# Altium PCB PCB1.PcbDoc
Units mil, origin at the board's own origin, x right, y up, seen from the top; angles counter-clockwise.
Board outline 6000 x 4000 mil, 2 copper layers (Top Layer, Bottom Layer); 93 components, 53 nets, 288 pads, 0 vias.
Unrouted connection lines stored in the file: 120.
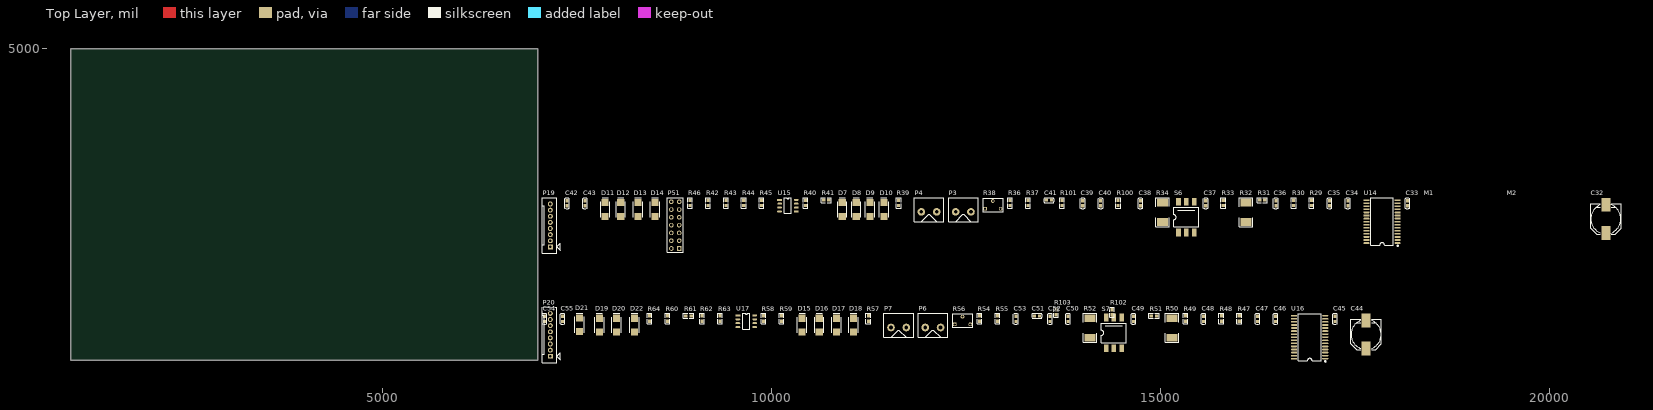
[diagram p0: Top Layer view]
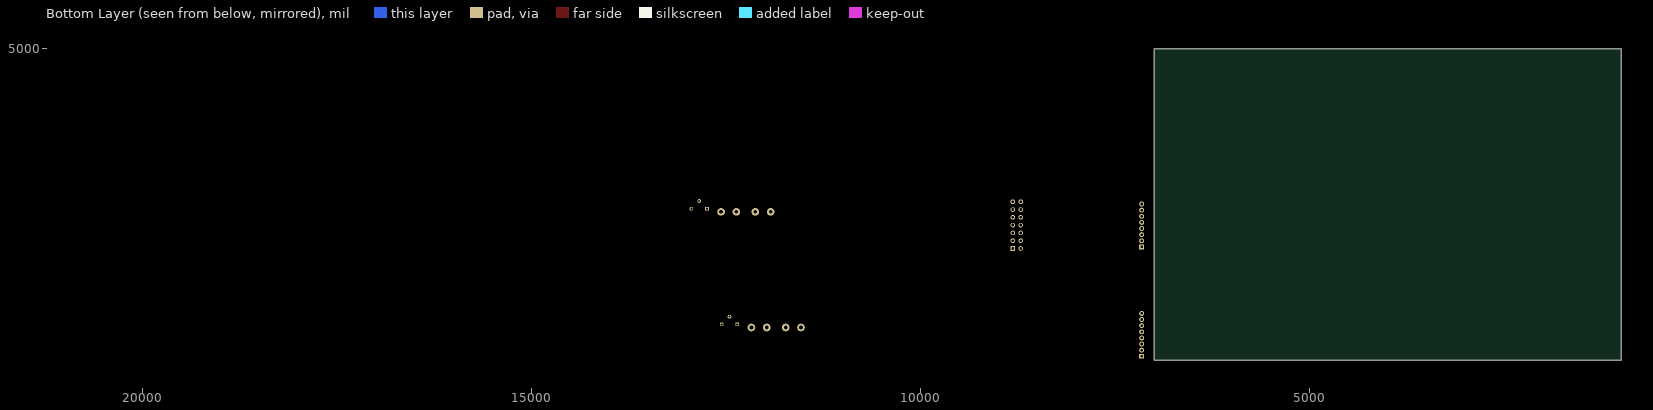
[diagram p1: Bottom Layer view, seen from below]

## Layer stack, top to bottom
Top Solder: solder mask 0.4, Solder Resist, Dk 3.5
Top Layer: signal copper 1.4
Dielectric 1: dielectric 12.6, FR-4, Dk 4.8
Bottom Layer: signal copper 1.4
Bottom Solder: solder mask 0.4, Solder Resist, Dk 3.5

## Board outline
1000,1000 7000,1000 7000,5000 1000,5000

## Design rules (kind name [scope] priority, off if disabled: settings)
Clearance [All] p1: gap=10
PolygonConnect [All] p1: connectstyle=Relief reliefconductorwidth=10 reliefentries=4 polygonreliefangle="90 Angle" airgapwidth=10
RoomDefinition 搅拌驱动驱动 [InComponentClass('搅拌驱动驱动')] p1: confinementstyle=ConfineIn formatcopy=TRUE lockcomponents=FALSE outline 7045,1740 20930,1740 20930,3195 7045,3195
RoomDefinition 升降电机驱动 [InComponentClass('升降电机驱动')] p2: confinementstyle=ConfineIn formatcopy=TRUE lockcomponents=FALSE outline 7045,960 18700,960 18700,1790 7045,1790
RoutingVias [All] p1: holewidth=28 width=50 viastyle="Through Hole" minholewidth=28 minwidth=50 maxholewidth=28 maxwidth=50
SolderMaskExpansion [All] p1: expansion=4
Width [All] p1: maxlimit=10 minlimit=10 preferedwidth=10
30 further rules are at their usual default settings.

## Classes and differential pairs
component class 搅拌驱动驱动: C32 C33 C34 C35 C36 C37 C38 C39 C40 C41 C42 C43 D7 D8 D9 D10 D11 D12 D13 D14 M1 M2 P3 P4 P19 P51 R29 R30 R31 R32 R33 R34 R36 R37 R38 R39 R40 R41 R42 R43 R44 R45 R46 R100 R101 S6 U14 U15
component class 升降电机驱动: P20 R102 R103

## Components (designator, comment, footprint, x,y, rotation, side; value= is the part's Value field where it differs from the comment)
C32 "Cap Pol" C-RB-S10 20720,2815 r90 top
C33 "Cap" C-RAD-0603 18170,3015 r90 top
C34 "Cap" C-RAD-0603 17405,3015 r90 top
C35 "Cap" C-RAD-0603 17170,3015 r90 top
C36 "Cap" C-RAD-0603 16480,3015 r90 top
C37 "Cap" C-RAD-0603 15580,3015 r90 top
C38 "Cap" C-RAD-0603 14740,3015 r90 top
C39 "Cap" C-RAD-0603 14000,3015 r90 top
C40 "Cap" C-RAD-0603 14230,3015 r90 top
C41 "Cap" C-RAD-0603 13565,3055 r0 top
C42 "Cap" C-RAD-0603 7375,3015 r90 top
C43 "Cap" C-RAD-0603 7605,3015 r90 top
C44 "Cap Pol" C-RB-S10 17640,1330 r90 top
C45 "Cap" C-RAD-0603 17240,1530 r90 top
C46 "Cap" C-RAD-0603 16475,1530 r90 top
C47 "Cap" C-RAD-0603 16245,1530 r90 top
C48 "Cap" C-RAD-0603 15550,1530 r90 top
C49 "Cap" C-RAD-0603 14650,1530 r90 top
C50 "Cap" C-RAD-0603 13810,1530 r90 top
C51 "Cap" C-RAD-0603 13410,1570 r0 top
C52 "Cap" C-RAD-0603 13580,1530 r90 top
C53 "Cap" C-RAD-0603 13140,1530 r90 top
C54 "Cap" C-RAD-0603 7085,1530 r90 top
C55 "Cap" C-RAD-0603 7315,1530 r90 top
D7 "D-Schottky" DIODE-SMA 10910,2935 r90 top
D8 "D-Schottky" DIODE-SMA 11090,2935 r90 top
D9 "D-Schottky" DIODE-SMA 11265,2935 r90 top
D10 "D-Schottky" DIODE-SMA 11445,2935 r90 top
D11 "D-Schottky" DIODE-SMA 7865,2935 r90 top
D12 "D-Schottky" DIODE-SMA 8065,2935 r90 top
D13 "D-Schottky" DIODE-SMA 8285,2935 r90 top
D14 "D-Schottky" DIODE-SMA 8505,2935 r90 top
D15 "D-Schottky" DIODE-SMA 10395,1450 r90 top
D16 "D-Schottky" DIODE-SMA 10615,1450 r90 top
D17 "D-Schottky" DIODE-SMA 10835,1450 r90 top
D18 "D-Schottky" DIODE-SMA 11055,1450 r90 top
D19 "D-Schottky" DIODE-SMA 7790,1450 r90 top
D20 "D-Schottky" DIODE-SMA 8010,1450 r90 top
D21 "D-Schottky" DIODE-SMA 7535,1455 r90 top
D22 "D-Schottky" DIODE-SMA 8240,1450 r90 top
M1 "散热器" 26*26*10对角37.5 18880,2420 r90 top
M2 "散热器" 26*26*10对角37.5 19950,2420 r90 top
P3 "cnt2p" 接线端子5mm间距2p 12465,2905 r0 top
P4 "cnt2p" 接线端子5mm间距2p 12025,2905 r0 top
P6 "cnt2p" 接线端子5mm间距2p 12075,1420 r0 top
P7 "cnt2p" 接线端子5mm间距2p 11635,1420 r0 top
P19 "Header 8" PH2.0-8P 7160,2455 r90 top
P20 "Header 8" PH2.0-8P 7160,1050 r90 top
P51 "Header 7X2" HDR7X2_A1 8815,2435 r90 top
R29 "Res1" 0603-1 16940,3020 r90 top
R30 "Res1" 0603-1 16710,3020 r90 top
R31 "Res1" 0603-1 16305,3055 r0 top
R32 "Res1" 2512 16095,2900 r90 top
R33 "Res1" 0603-1 15805,3020 r90 top
R34 "Res1" 2512 15025,2900 r90 top
R36 "Res1" 0603-1 13065,3020 r90 top
R37 "Res1" 0603-1 13295,3020 r90 top
R38 "RPot" VR-3266W 12845,2995 r0 top
R39 "Res1" 0603-1 11635,3020 r90 top
R40 "Res1" 0603-1 10440,3020 r90 top
R41 "Res1" 0603-1 10705,3055 r0 top
R42 "Res1" 0603-1 9185,3020 r90 top
R43 "Res1" 0603-1 9415,3020 r90 top
R44 "Res1" 0603-1 9645,3020 r90 top
R45 "Res1" 0603-1 9875,3020 r90 top
R46 "Res1" 0603-1 8955,3020 r90 top
R47 "Res1" 0603-1 16010,1535 r90 top
R48 "Res1" 0603-1 15780,1535 r90 top
R49 "Res1" 0603-1 15320,1535 r90 top
R50 "Res1" 2512 15145,1415 r90 top
R51 "Res1" 0603-1 14915,1570 r0 top
R52 "Res1" 2512 14095,1415 r90 top
R54 "Res1" 0603-1 12675,1535 r90 top
R55 "Res1" 0603-1 12905,1535 r90 top
R56 "RPot" VR-3266W 12455,1510 r0 top
R57 "Res1" 0603-1 11245,1535 r90 top
R58 "Res1" 0603-1 9900,1535 r90 top
R59 "Res1" 0603-1 10130,1535 r90 top
R60 "Res1" 0603-1 8665,1535 r90 top
R61 "Res1" 0603-1 8935,1570 r0 top
R62 "Res1" 0603-1 9110,1535 r90 top
R63 "Res1" 0603-1 9340,1535 r90 top
R64 "Res1" 0603-1 8435,1535 r90 top
R100 "Res1" 0603-1 14455,3020 r90 top
R101 "Res1" 0603-1 13735,3020 r90 top
R102 "Res1" 0603-1 14375,1615 r90 top
R103 "Res1" 0603-1 13655,1615 r90 top
S6 "SW3" SW6_3BIT 15230,2640 r0 top
S7 "SW3" SW6_3BIT 14300,1155 r0 top
U14 "THB6128/LV8728" SIOC-30-W 17845,2780 r90 top
U15 "EL0631" EL0631 10105,3060 r0 top
U16 "THB6128/LV8728" SIOC-30-W 16915,1295 r90 top
U17 "EL0631" EL0631 9570,1575 r0 top

## Footprints (in the part's own frame and the unit in brackets; to place one, negate y for a bottom-side part, rotate by r counter-clockwise, add the part's x,y. Pads: shape width x height; smd on the part's side, far side on the other; paste and mask are expansions set on the pad)
26*26*10对角37.5 [mil]
  round 60 hole 125.98: 0(-590,-432.5) 0(590,432.5)
  body extent -670,-512 669,511, height 591
0603-1 [mm] "贴片带丝印"
  rect 1.1x1 smd: 1(-0.85,0) 2(0.85,0)
  silkscreen extent -1.65,-0.76 1.65,0.76, body extent -0.8,-0.38 0.8,0.42, height 0.3
2512 [mm] "保险丝"
  rect 2.5x3.6 smd: 1(-3.175,0) 2(3.175,0)
  silkscreen extent -4.7,-2.2 4.7,2.2, body extent -3.05,-1.5 3.3,1.5, height 1.6
C-RAD-0603 [mm] "贴片电容"
  rect 1.1x1 smd: 1(-0.85,0) 2(0.85,0)
  silkscreen extent -1.73,-0.76 1.73,0.76, body extent -0.8,-0.38 0.8,0.42, height 0.3
C-RB-S10 [mm] "贴片电解"
  rect 4.5x3 smd: 1(-4.6,0) 2(4.6,0)
  silkscreen extent -5,-5 5,5, body extent -5.5,-5.2 5.5,5.2, height 10.41
DIODE-SMA [mm] "贴片二极管"
  rect 2.3x2.3 smd: 1(-2.25,0) 2(2.25,0)
  silkscreen extent -2.54,-1.52 3.81,1.52, body extent -2.3,-1.35 2.3,1.35, height 2.4
EL0631 [mm]
  rect 1.52x0.64 smd: 1(0,0)
  oval 1.52x0.64 smd: 2(0,-1.27) 3(0,-2.54) 4(0,-3.81) 5(5.47,-3.81) 6(5.47,-2.54) 7(5.47,-1.27) 8(5.47,0)
  silkscreen extent 1.59,-4.44 3.88,0.64
HDR7X2_A1 [mm] "Connector; Header; 7x2 Position"
  rect 1.5x1.5 hole 0.9: 1(0,0)
  round 1.5 hole 0.9: 2(0,2.54) 3(2.54,0) 4(2.54,2.54) 5(5.08,0) 6(5.08,2.54) 7(7.62,0) 8(7.62,2.54) 9(10.16,0) 10(10.16,2.54) 11(12.7,0) 12(12.7,2.54) 13(15.24,0) 14(15.24,2.54)
  silkscreen extent -1.27,-1.27 16.51,3.81
PH2.0-8P [mm]
  rect 1.6x1.6 hole 0.86: 1(0,0)
  round 1.6 hole 0.86: 2(2,0) 3(4,0) 4(6,0) 5(8,0) 6(10,0) 7(12,0) 8(14,0)
  silkscreen extent -2.03,-3.17 16,2.67
SIOC-30-W [mm]
  oval 0.55x2 smd: 1(-7,-5.08) 2(-6,-5.08) 3(-5,-5.08) 4(-4,-5.08) 5(-3,-5.08) 6(-2,-5.08) 7(-1,-5.08) 8(0,-5.08) 9(1,-5.08) 10(2,-5.08) 11(3,-5.08) 12(4,-5.08) 13(5,-5.08) 14(6,-5.08) 15(7,-5.08) 16(7,5.08) 17(6,5.08) 18(5,5.08) 19(4,5.08) 20(3,5.08) 21(2,5.08) 22(1,5.08) 23(0,5.08) 24(-1,5.08) 25(-2,5.08) 26(-3,5.08) 27(-4,5.08) 28(-5,5.08) 29(-6,5.08) 30(-7,5.08)
  silkscreen extent -8.1,-5.3 7.73,3.7, body extent -7.8,-5.25 7.75,5.25, height 2.37
SW6_3BIT [mm] "贴片拨码开关2.54"
  rect 1.5x2.5 smd: 1(0,0) 2(2.54,0) 3(5.08,0) 4(5.08,10) 5(2.54,10) 6(0,10)
  silkscreen extent -1.52,1.83 6.6,8.18, body extent -1.27,0.43 6.35,9.73, height 4.35
VR-3266W [mm] "3266电位器"
  rect 1.2x1.2 hole 0.7: 1(-2.54,-1.27)
  round 1.2 hole 0.7: 2(0,1.27) 3(2.54,-1.27)
  silkscreen extent -3.3,-2.29 3.41,2.21, body extent -3.3,-2.29 3.4,2.21, height 8.25
接线端子5mm间距2p [mm]
  round 2.5 hole 1.2: 1(-2.5,0) 2(2.5,0)
  silkscreen extent -4.81,-3.24 4.84,4.57, body extent -4.94,-3.11 4.96,4.49, height 10

## Part data
C32 C44: "极性电解电容"
C33 C34 C35 C36 C37 C38 C39 C40 C41 C42 C43 C45 C46 C47 C48 C49 C50 C51 C52 C53 C54 C55: "无极性电容"
D7 D8 D9 D10 D11 D12 D13 D14 D15 D16 D17 D18 D19 D20 D21 D22: "肖特基二极管"
M1 M2: library part 26*26*10散热器, "26*26*10MM散热器孔距37MM"
P19 P20: "Header, 8-Pin"
P51: "Header, 7-Pin"
R29 R30 R31 R32 R33 R34 R36 R37 R39 R40 R41 R42 R43 R44 R45 R46 R47 R48 R49 R50 R51 R52 R54 R55 R57 R58 R59 R60 R61 R62 R63 R64 R100 R101 R102 R103: "贴片电阻"
R38 R56: "精密可调电阻"
S6 S7: "3位编码开关"
U14 U16: library part THB6128, "步进电机驱动"
U15 U17: "双路隔离光耦"

## Nets (pads, with @x,y where several pads share a name; then routed paths per layer and width w, separated by ;. In a path a pad name is that pad's centre, name@x,y a point inside that pad or via, vN(x,y) a via of type N, cw(c..) or ccw(c..) an arc to the next point about the centre after c; other vN are vias at no path point)
12~24V: P51.13 P51.14
+5V: C34.1 P19.7 P20.7 P51.9 R33.2 R36.2 R38.1 R40.2 R41.2 R100.2 R102.2 S6.1 S6.2 S6.3 U14.25 U14.29 U14.30 U15.8
+24V: C32.1 C33.1 C35.2 C36.2 C39.2 D11.2 D12.2 D13.2 D14.2 P19.8 P20.8 U14.2 U14.5 U14.11
A1+: 
A1-: 
A2+: D10.2 D14.1 P4.2 R45.1 U14.3
A2-: D9.2 D13.1 P4.1 R44.1 U14.7
B1+: 
B1-: 
B2+: D8.2 D12.1 P3.2 R43.1 U14.9
B2-: D7.2 D11.1 P3.1 R42.1 U14.13
CLK1: 
CLK2: C43.2 R41.1 U14.21 U15.6
CW1: 
CW2: C42.2 R40.1 U14.22 U15.7
DIR1: P19.3 P51.8
DIR2: P20.3 P51.6 U15.2
GND: C32.2 C34.2 C35.1 C36.1 C37.1 C38.2 C39.1 C40.2 C41.1 C42.1 C43.1 D7.1 D8.1 D9.1 D10.1 P19.1 P20.1 P51.1 P51.2 R29.2 R30.2 R31.2 R32.1 R34.2 R38.3 R42.2 R43.2 R44.2 R45.2 R101.2 R103.2 U14.4 U14.12 U14.14 U14.23 U15.5
M1_1: 
M1_2: 
M1_3: 
M2_1: R29.1 S6.4 U14.28
M2_2: R30.1 S6.5 U14.27
M2_3: R31.1 S6.6 U14.26
NetC33_2: 
NetC37_2: 
NetC38_1: 
NetC40_1: 
NetC41_2: 
NetC45_2: C33.2 U14.1
NetC49_2: C37.2 R33.1 U14.24
NetC50_1: C38.1 U14.20
NetC52_1: C40.1 U14.19
NetC53_2: C41.2 R37.2 R38.2 U14.15
NetR32_2: 
NetR34_1: 
NetR36_1: 
NetR37_1: 
NetR39_1: 
NetR46_1: 
NetR50_2: R32.2 U14.6
NetR52_1: R34.1 U14.10
NetR54_1: R36.1 U14.16
NetR55_1: R37.1 U14.17
NetR57_1: R39.1 U15.1
NetR64_1: R46.1 U15.4
NetR100_1: R100.1 R101.1
NetR102_1: R102.1 R103.1 U14.18
PUL1: 
PUL2: U15.3
PWM1: P19.2 P51.7
PWM2: P20.2 P51.5
VCC3.3: P19.6 P20.6 P51.10 R39.2 R46.2
pads on no net: C44.1 C44.2 C45.1 C45.2 C46.1 C46.2 C47.1 C47.2 C48.1 C48.2 C49.1 C49.2 C50.1 C50.2 C51.1 C51.2 C52.1 C52.2 C53.1 C53.2 C54.1 C54.2 C55.1 C55.2 D15.1 D15.2 D16.1 D16.2 D17.1 D17.2 D18.1 D18.2 D19.1 D19.2 D20.1 D20.2 D21.1 D21.2 D22.1 D22.2 M1.0 M2.0 P6.1 P6.2 P7.1 P7.2 P19.4 P19.5 P20.4 P20.5 P51.3 P51.4 P51.11 P51.12 R47.1 R47.2 R48.1 R48.2 R49.1 R49.2 R50.1 R50.2 R51.1 R51.2 R52.1 R52.2 R54.1 R54.2 R55.1 R55.2 R56.1 R56.2 R56.3 R57.1 R57.2 R58.1 R58.2 R59.1 R59.2 R60.1 R60.2 R61.1 R61.2 R62.1 R62.2 R63.1 R63.2 R64.1 R64.2 S7.1 S7.2 S7.3 S7.4 S7.5 S7.6 U14.8 U16.1 U16.2 U16.3 U16.4 U16.5 U16.6 U16.7 U16.8 U16.9 U16.10 U16.11 U16.12 U16.13 U16.14 U16.15 U16.16 U16.17 U16.18 U16.19 U16.20 U16.21 U16.22 U16.23 U16.24 U16.25 U16.26 U16.27 U16.28 U16.29 U16.30 U17.1 U17.2 U17.3 U17.4 U17.5 U17.6 U17.7 U17.8